# EAGLE board tradfri_ICC-1 (EAGLE 9.6.2)
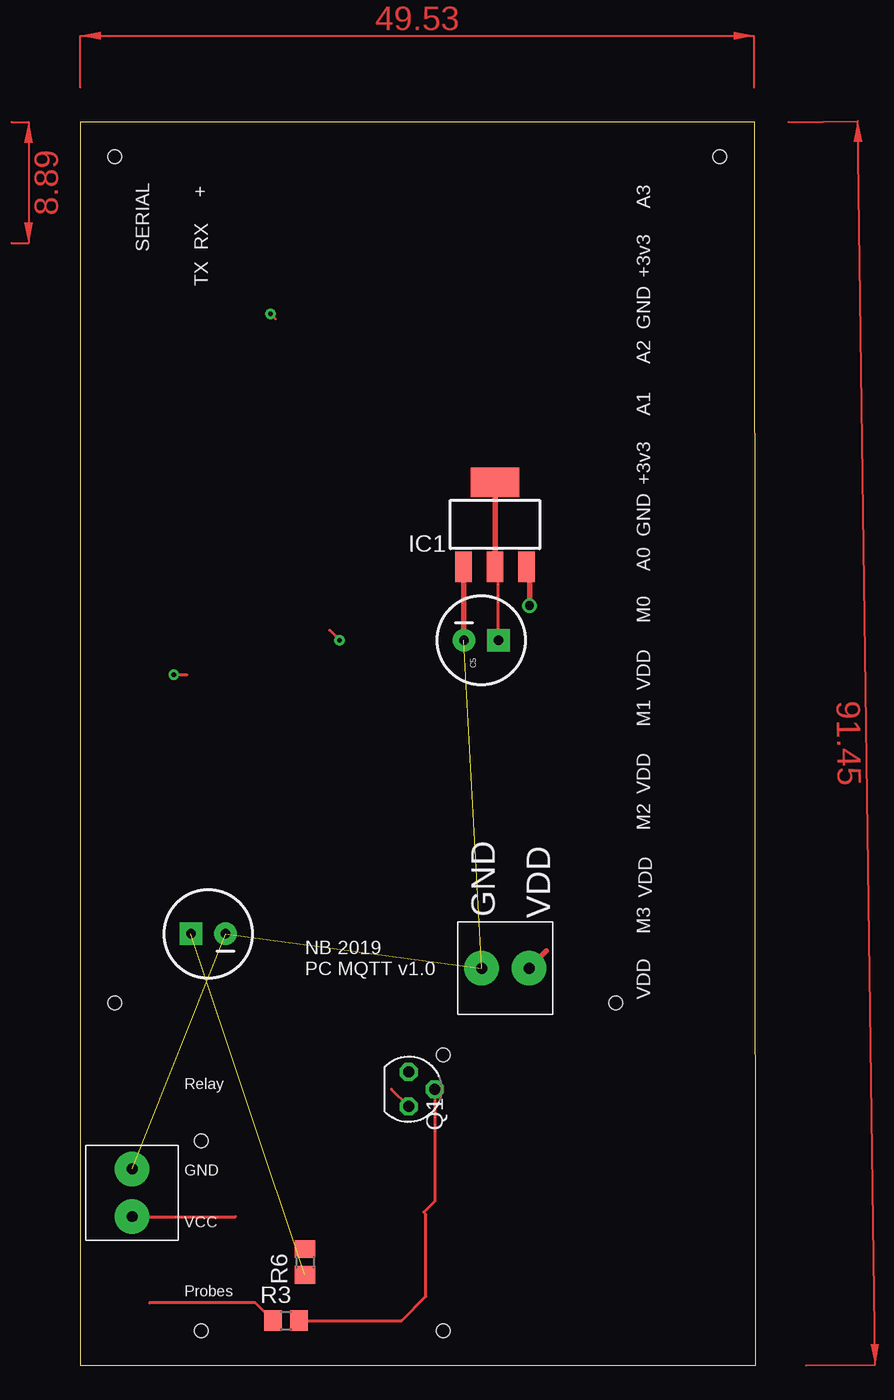
[diagram p0: board, top side]
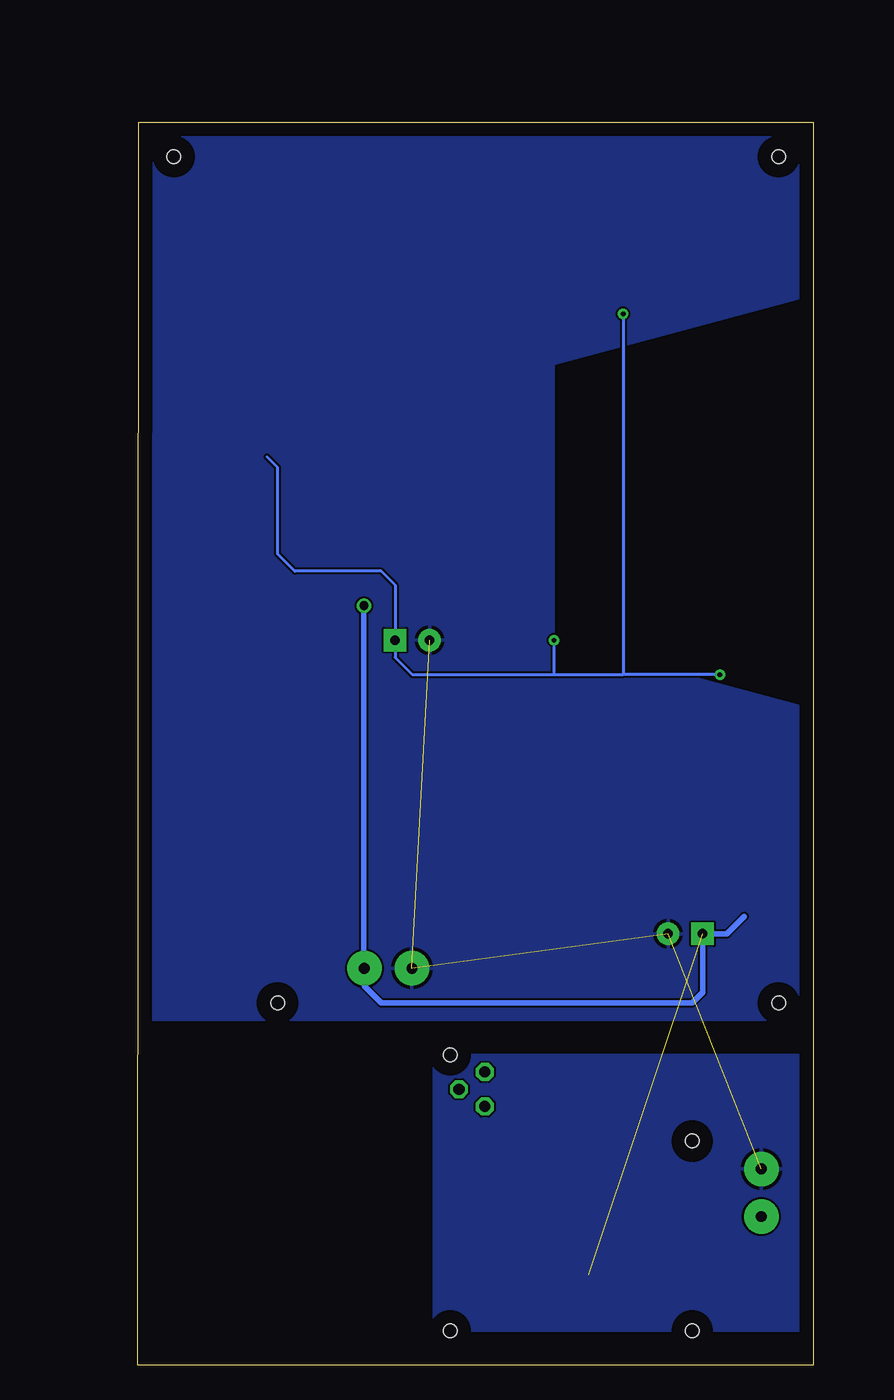
[diagram p1: board, bottom side, seen from below]

Size 49.66 x 91.43 mm. Coordinates in mm from the lower left corner, seen from the top.
Outline: 0,0 49.66,0 49.58,91.43 0,91.43 0,0
Copper layers (1*16): Top 0.035mm / dielectric 1.5mm / Bottom 0.035mm
Design rules "default": minimum track width 6mil, minimum drill 0.35mm, track to track 6mil, track to pad 6mil, pad to pad 6mil, via to via 6mil, smd to smd 6mil, copper to edge 40mil, drill to drill 6mil, minimum pad ring 10mil, minimum via ring 8mil, stop-mask expansion 4mil, vias tented up to drill 0mil, thermal gap 10mil
Net classes: 1 +3v3: width 0.406 mm; 2 GND: width 0.406 mm
Holes 1 mm at 2.54,88.9 46.99,88.9 2.54,26.67 39.37,26.67 26.67,2.54 8.89,16.51 8.89,2.54 26.67,22.86

## Footprints (pad centres in the part's own frame; a part is rotated, then mirrored left to right if it is on the bottom)
CPOL-RADIAL-100UF-25V = drill 0.7 pad 1.651 square: 1 1.27,0 | drill 0.7 pad 1.651: 2 -1.27,0
SOT223 = smd 1.219 x 2.235: 1 -2.311,-3.099; 2 0,-3.099; 3 2.311,-3.099 | smd 3.6 x 2.2: TAB 0,3.099
KF350-2P = drill 0.8 pad 2.54: 1 -1.75,0; 2 1.75,0
SOT54A = drill 0.813 octagon: B 0,1.905; C -1.27,0; E 1.27,0
R0805 = smd 1.3 x 1.5: 1 -0.95,0; 2 0.95,0

## Placement (x,y rotation side)
C3  [CPOL-RADIAL-100UF-25V]  9.4,31.75 180 top
C5  [CPOL-RADIAL-100UF-25V]  29.46,53.34 0 top
IC1  LM1117MPX-3.3  [SOT223]  30.48,61.85 0 top
PWR_IN  KF350-P2  [KF350-2P]  31.24,29.21 0 top
Q1  BC337  [SOT54A]  24.13,20.32 270 top
R3  470  [R0805]  15.11,3.3 0 top
R6  1K  [R0805]  16.51,7.62 270 top
U$3  KF350-P2  [KF350-2P]  3.81,12.7 90 top

## Library data of the parts
C3 C5 = SparkFun-Capacitors; PROD_ID: CAP-08439
IC1 = lm1117
PWR_IN U$3 = KF350-P2
Q1 = transistor-small-signal
R3 R6 = resistor

## Nets
+3V3: C5.1 IC1.2 IC1.TAB
GND: C3.2 C5.2 IC1.1 PWR_IN.1 U$3.2
N$1: Q1.B R3.2
N$2: R6.1
N$5: Q1.E
N$8: R3.1
N$11: U$3.1
VDD: C3.1 IC1.3 PWR_IN.2 R6.2

## Tracks (layer width: path | path; a pad name or v marks a point on that pad's centre or on a via)
+3V3  (via drill 0.35)
  Top 0.203: IC1.2 30.73,58.5 C5.1 | v19.05,53.34 18.32,54.07 | 14.35,76.96 v13.97,77.34 | v6.86,50.8 7.83,50.8
  Top 0.406: 29.88,65.44 29.21,64.77 30.3,64.77 IC1.TAB IC1.2
  Bottom 0.203: 40.16,66.83 39.37,66.04 39.37,59.69 38.1,58.42 31.75,58.42 30.73,57.4 C5.1 30.73,52.07 29.46,50.8 19.05,50.8 | 19.05,50.8 13.97,50.8 | 19.05,50.8 v19.05,53.34 | v13.97,77.34 13.97,50.8 | v6.86,50.8 13.97,50.8
GND  (3 unrouted)
  Top 0.406: C5.2 28.17,53.36 IC1.1
  pour Bottom: 0,91.44 49.53,91.44 49.53,25.4 0,25.4 0,48.26 19.05,53.34 19.05,73.66 0,78.74
  pour Bottom: 0,22.86 27.94,22.86 27.94,2.54 0,2.54
N$1
  Top 0.203: R3.2 23.62,3.3 25.4,5.08 25.4,11.11 25.24,11.27 25.69,11.71 26.03,12.07 Q1.B
N$5
  Top 0.203: Q1.E 22.86,20.32
N$8
  Top 0.203: 5.08,4.6 12.87,4.6 R3.1
N$11
  Top 0.203: U$3.1 11.42,10.95
VDD  (via drill 0.65)  (1 unrouted)
  Top 0.406: IC1.3 33.02,58.52 v33.02,55.88 | PWR_IN.2 34.26,30.48
  Bottom 0.406: v33.02,55.88 33.02,29.24 PWR_IN.2 32.99,27.91 31.75,26.67 8.89,26.67 8.13,27.43 C3.1 6.35,31.75 5.08,33.02
(copper drawn outside any net)
  shapes: Top area x3

## Text on the board
tPlace: + | SERIAL | RX | TX | NB 2019 / PC MQTT v1.0
tNames: A3 | +3v3 | GND | A2 | A1 | +3v3 | GND | A0 | M0 | VDD | M1 | VDD | M2 | VDD | GND | VDD | M3 | VDD | Relay | GND | VCC | Probes